# EAGLE board Crimea (EAGLE 8.2.1), part 1 of 2
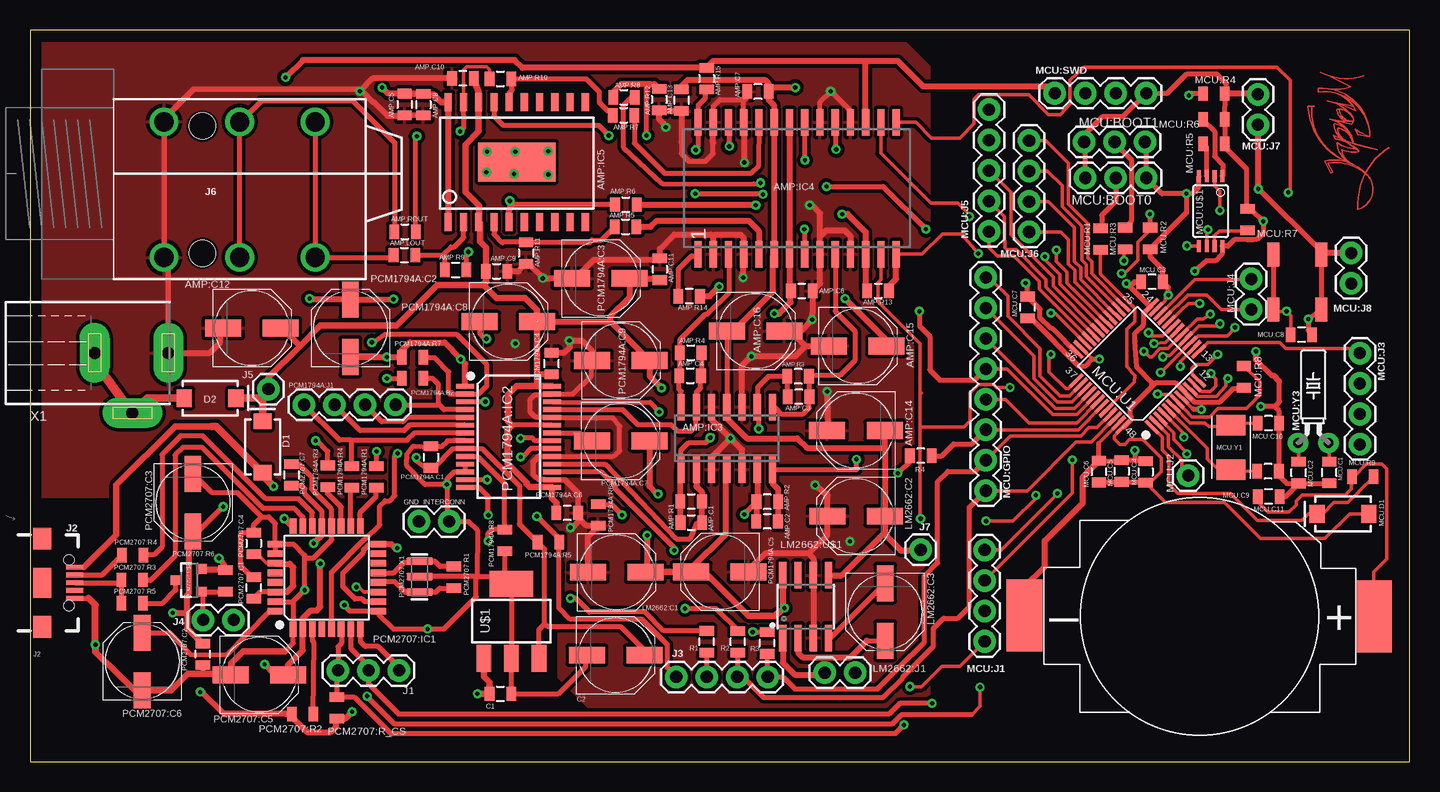
[diagram p0: board, top side]
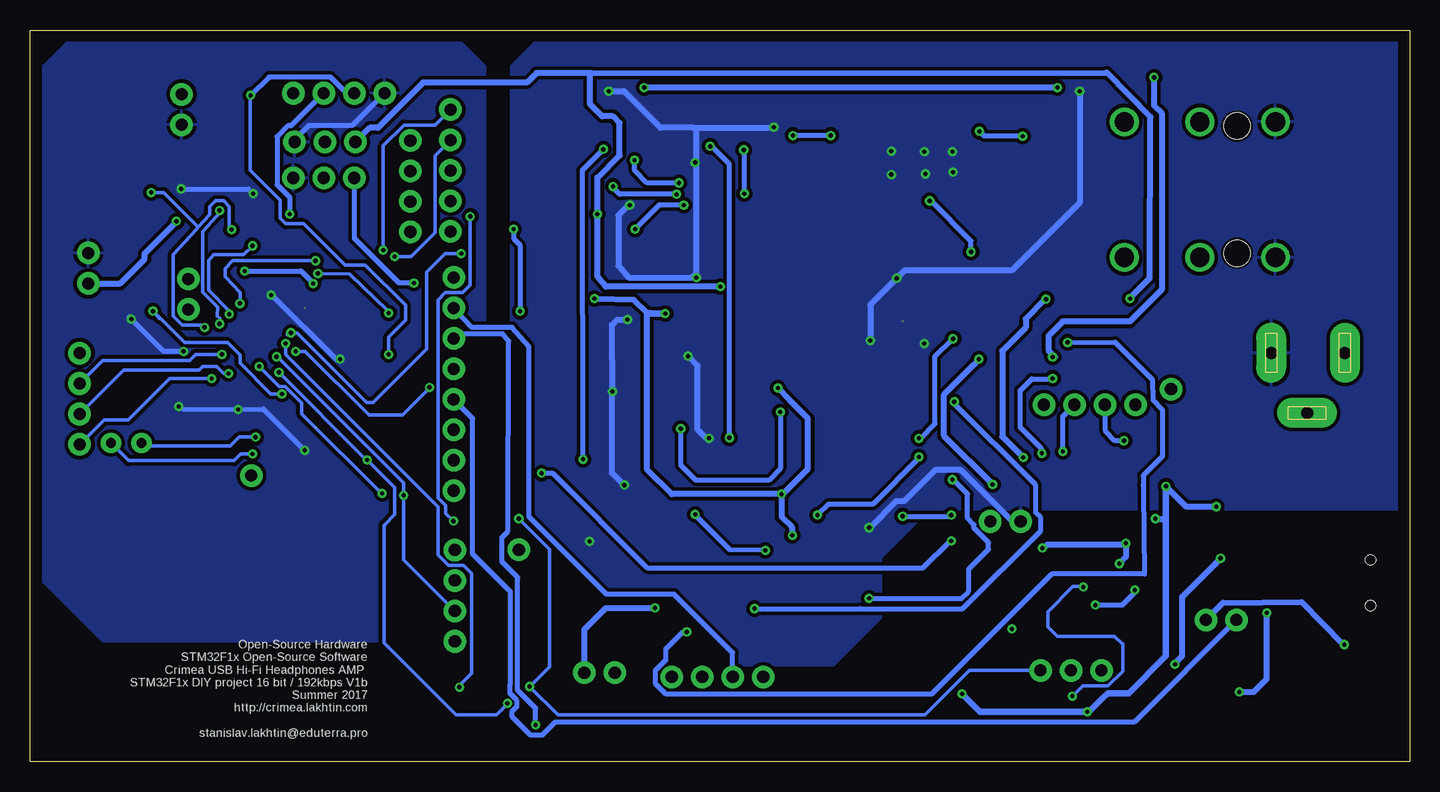
[diagram p1: board, bottom side, seen from below]

Size 115 x 61 mm. Coordinates in mm from the lower left corner, seen from the top.
Outline: 0,0 115,0 115,61 0,61 0,0
Copper layers (1*16): Top 0.035mm / dielectric 1.6mm / Bottom 0.035mm
Design rules "default *": minimum track width 0.2mm, minimum drill 0.2mm, track to track 0.3mm, track to pad 0.3mm, pad to pad 0.3mm, via to via 0.3mm, smd to smd 0.1mm, copper to edge 0.2mm, drill to drill 0.2mm, minimum pad ring 10mil, minimum via ring 8mil, stop-mask expansion 4mil, vias tented up to drill 0mil, thermal gap 12mil
Net classes: 0 default: width 0.3 mm; 1 GND: width 0.4 mm, drill 0.6 mm; 2 DGND: width 0.4 mm, drill 0.4 mm; 3 POWER: width 0.4 mm, drill 0.6 mm

## Footprints (pad centres in the part's own frame; a part is rotated, then mirrored left to right if it is on the bottom)
0805 = smd 0.8 x 1.2: 1 -0.9,0; 2 0.9,0
PANASONIC_D = smd 3 x 1.4: + 2.4,0; - -2.4,0
SO14 = smd 0.6 x 2.2: 1 -3.81,-2.6; 2 -2.54,-2.6; 3 -1.27,-2.6; 4 0,-2.6; 5 1.27,-2.6; 6 2.54,-2.6; 7 3.81,-2.6; 8 3.81,2.6; 9 2.54,2.6; 10 1.27,2.6; 11 0,2.6; 12 -1.27,2.6; 13 -2.54,2.6; 14 -3.81,2.6
SOP28 = smd 0.6 x 2.2: 1 -8.255,-5.5; 2 -6.985,-5.5; 3 -5.715,-5.5; 4 -4.445,-5.5; 5 -3.175,-5.5; 6 -1.905,-5.5; 7 -0.635,-5.5; 8 0.635,-5.5; 9 1.905,-5.5; 10 3.175,-5.5; 11 4.445,-5.5; 12 5.715,-5.5; 13 6.985,-5.5; 14 8.255,-5.5; 15 8.255,5.5; 16 6.985,5.5; 17 5.715,5.5; 18 4.445,5.5; 19 3.175,5.5; 20 1.905,5.5; 21 0.635,5.5; 22 -0.635,5.5; 23 -1.905,5.5; 24 -3.175,5.5; 25 -4.445,5.5; 26 -5.715,5.5; 27 -6.985,5.5; 28 -8.255,5.5
SOIC20S = smd 0.6 x 1.5: 1 -5.715,-5; 2 -4.445,-5; 3 -3.175,-5; 4 -1.905,-5; 5 -0.635,-5; 6 0.635,-5; 7 1.905,-5; 8 3.175,-5; 9 4.445,-5; 10 5.715,-5; 11 5.715,5; 12 4.445,5; 13 3.175,5; 14 1.905,5; 15 0.635,5; 16 -0.635,5; 17 -1.905,5; 18 -3.175,5; 19 -4.445,5; 20 -5.715,5 | smd 6.452 x 3.251: P$1 0,0
SMA-DIODE = smd 1.27 x 1.47: A -2.15,0; C 2.15,0
1X02 = drill 1.016 pad 1.88: 1 0,0; 2 2.54,0
1X03 = drill 1.016 pad 1.88: 1 0,0; 2 2.54,0; 3 5.08,0
USB-AB-MICRO-SMD = smd 1.4 x 0.4: D+1 2.7,0; D-1 2.7,0.65; GND1 2.7,-1.3; ID1 2.7,-0.65; VBUS1 2.7,1.3 | smd 1.5 x 1.8: SHLD1 0,-3.68; SHLD2 0,3.68 | smd 1.5 x 2.5: SHLD3 0,0 | hole 0.85: 2.2,1.9; 2.2,-1.9
1X04 = drill 1.016 pad 1.88: 1 0,0; 2 2.54,0; 3 5.08,0; 4 7.62,0
1X01 = drill 1.016 pad 1.88: 1 0,0
AUDIO_JACK_0.25"_TRS_PTH_RA = drill 1.6: RING 10.5,-6.95; RING-NORM 10.5,4.35; SLEEVE 4.2,-6.95; SLEEVE-NORM 4.2,4.35; TIP 16.8,-6.95; TIP-NORM 16.8,4.35 | hole 2.2: 7.4,4; 7.4,-6.6
SOIC-8 = smd 0.61 x 2.21: 1 -1.905,-2.616; 2 -0.635,-2.616; 3 0.635,-2.616; 4 1.905,-2.616; 5 1.905,2.616; 6 0.635,2.616; 7 -0.635,2.616; 8 -1.905,2.616
1X08 = drill 1.016 pad 1.88: 1 0,0; 2 2.54,0; 3 5.08,0; 4 7.62,0; 5 10.16,0; 6 12.7,0; 7 15.24,0; 8 17.78,0
1X05 = drill 1.016 pad 1.88: 1 0,0; 2 2.54,0; 3 5.08,0; 4 7.62,0; 5 10.16,0
LQFP48-0.5-7X7MM = smd 1.5 x 0.3: 1 -4.45,2.75; 2 -4.45,2.25; 3 -4.45,1.75; 4 -4.45,1.25; 5 -4.45,0.75; 6 -4.45,0.25; 7 -4.45,-0.25; 8 -4.45,-0.75; 9 -4.45,-1.25; 10 -4.45,-1.75; 11 -4.45,-2.25; 12 -4.45,-2.75; 25 4.45,-2.75; 26 4.45,-2.25; 27 4.45,-1.75; 28 4.45,-1.25; 29 4.45,-0.75; 30 4.45,-0.25; 31 4.45,0.25; 32 4.45,0.75; 33 4.45,1.25; 34 4.45,1.75; 35 4.45,2.25; 36 4.45,2.75 | smd 0.3 x 1.5: 13 -2.75,-4.45; 14 -2.25,-4.45; 15 -1.75,-4.45; 16 -1.25,-4.45; 17 -0.75,-4.45; 18 -0.25,-4.45; 19 0.25,-4.45; 20 0.75,-4.45; 21 1.25,-4.45; 22 1.75,-4.45; 23 2.25,-4.45; 24 2.75,-4.45; 37 2.75,4.45; 38 2.25,4.45; 39 1.75,4.45; 40 1.25,4.45; 41 0.75,4.45; 42 0.25,4.45; 43 -0.25,4.45; 44 -0.75,4.45; 45 -1.25,4.45; 46 -1.75,4.45; 47 -2.25,4.45; 48 -2.75,4.45
TSSOP8 = smd 0.35 x 1: 1 -0.975,-2.925; 2 -0.325,-2.925; 3 0.325,-2.925; 4 0.975,-2.925; 5 0.975,2.925; 6 0.325,2.925; 7 -0.325,2.925; 8 -0.975,2.925
PUSHBUTTON_4X4 = smd 1 x 2: P$1 2,2.3; P$2 2,-2.3; P$3 -2,-2.3; P$4 -2,2.3
20MM_BATTERY_3V = smd 3 x 6: MINUS -14.6,0.1; PLUS 14.5,0
CRYSTAL-TXC-7A = smd 1.7 x 2.4: P$1 1.85,0; P$2 -1.85,0
CRYSTAL-PTH-2X6-CYL-KIT = drill 0.813 pad 1.676: 1 -1.27,0; 2 1.27,0
SSOP28-0.65-10.2X5.2MM = smd 0.4 x 1.5: 1 -4.225,-3.625; 2 -3.575,-3.625; 3 -2.925,-3.625; 4 -2.275,-3.625; 5 -1.625,-3.625; 6 -0.975,-3.625; 7 -0.325,-3.625; 8 0.325,-3.625; 9 0.975,-3.625; 10 1.625,-3.625; 11 2.275,-3.625; 12 2.925,-3.625; 13 3.575,-3.625; 14 4.225,-3.625; 15 4.225,3.625; 16 3.575,3.625; 17 2.925,3.625; 18 2.275,3.625; 19 1.625,3.625; 20 0.975,3.625; 21 0.325,3.625; 22 -0.325,3.625; 23 -0.975,3.625; 24 -1.625,3.625; 25 -2.275,3.625; 26 -2.925,3.625; 27 -3.575,3.625; 28 -4.225,3.625
TQFP32-0.8-7X7MM = smd 1.27 x 0.559: 1 -4.293,2.8; 2 -4.293,2; 3 -4.293,1.2; 4 -4.293,0.4; 5 -4.293,-0.4; 6 -4.293,-1.2; 7 -4.293,-2; 8 -4.293,-2.8; 17 4.293,-2.8; 18 4.293,-2; 19 4.293,-1.2; 20 4.293,-0.4; 21 4.293,0.4; 22 4.293,1.2; 23 4.293,2; 24 4.293,2.8 | smd 0.559 x 1.27: 9 -2.8,-4.293; 10 -2,-4.293; 11 -1.2,-4.293; 12 -0.4,-4.293; 13 0.4,-4.293; 14 1.2,-4.293; 15 2,-4.293; 16 2.8,-4.293; 25 2.8,4.293; 26 2,4.293; 27 1.2,4.293; 28 0.4,4.293; 29 -0.4,4.293; 30 -1.2,4.293; 31 -2,4.293; 32 -2.8,4.293
SOT23-3 = smd 0.8 x 0.9: 1 -0.95,-1; 2 0.95,-1; 3 0,1.1
RESONATOR-SMD-3.2X1.3 = smd 0.61 x 2.184: 1 -1.283,-0.006; 2 0,0; 3 1.27,-0.006
SOT223 = smd 1.219 x 2.235: 1 -2.311,-3.099; 2 0,-3.099; 3 2.311,-3.099 | smd 3.6 x 2.2: 4 0,3.099
733980-62 = drill 1 pad 2.5 long: 1 0,8.57; 2 0,2.42; 3 5,5.57

## Placement (x,y rotation side)
AMP:C1  2.7nF  [0805]  55.13,19.93 0 top
AMP:C2  2.7nF  [0805]  61.45,20.02 180 top
AMP:C3  2.7nF  [0805]  64.08,30.42 180 top
AMP:C4  2.7nF  [0805]  55.04,32.18 0 top
AMP:C5  0.1uF  [0805]  31.23,54.79 270 top
AMP:C6  0.1uF  [0805]  64.34,39.24 0 top
AMP:C7  0.1uF  [0805]  60.69,55.86 180 top
AMP:C8  10uF  [0805]  32.79,54.77 270 top
AMP:C9  0.1uF  [0805]  38.9,40.89 0 top
AMP:C10  10uF  [0805]  36.09,56.97 180 top
AMP:C11  0.1uF  [0805]  52.5,41.05 270 top
AMP:C12  10uF  [PANASONIC_D]  18.5,36.15 0 top
AMP:C13  0.1uF  [0805]  54.3,55.15 270 top
AMP:C14  10uF  [PANASONIC_D]  68.85,27.6 180 top
AMP:C15  100uF  [PANASONIC_D]  69,34.65 0 top
AMP:C16  100uF  [PANASONIC_D]  60.5,35.9 0 top
AMP:IC3  OPA4134D  [SO14]  58.09,26.95 0 top
AMP:IC4  PGA4311  [SOP28]  63.95,47.8 0 top
AMP:IC5  TPA6120A2  [SOIC20S]  40.58,49.99 0 top
AMP:LOUT  37,8  [0805]  31.21,42.23 0 top
AMP:R1  1K  [0805]  55.12,21.69 0 top
AMP:R2  1K  [0805]  61.46,21.66 180 top
AMP:R3  1K  [0805]  64.04,32.11 180 top
AMP:R4  1K  [0805]  55.08,34.09 0 top
AMP:R5  1K  [0805]  49.65,44.59 0 top
AMP:R6  1K  [0805]  49.67,46.44 0 top
AMP:R7  1K  [0805]  49.49,53.89 0 top
AMP:R8  1K  [0805]  49.51,55.39 0 top
AMP:R9  1K  [0805]  35.48,40.99 0 top
AMP:R10  1K  [0805]  39.21,56.93 0 top
AMP:R11  1K  [0805]  41.35,42.4 270 top
AMP:R12  1K  [0805]  52.45,55.2 270 top
AMP:R13  100K  [0805]  70.7,39.25 0 top
AMP:R14  100K  [0805]  54.95,38.8 180 top
AMP:R15  100K  [0805]  56.4,56.95 270 top
AMP:ROUT  37,8  [0805]  31.26,44.18 0 top
C1  1.5uF  [0805]  39.21,5.65 0 top
C2  220uF  [PANASONIC_D]  48.82,8.87 0 top
D1  0.5A/5V  [SMA-DIODE]  19.4,26.23 90 top
D2  1.5A/5V  [SMA-DIODE]  15.01,30.3 0 top
GND_INTERCONN  GNDCONNECTOR  [1X02]  32.41,20.02 0 top
J1  SPI  [1X03]  30.76,7.6 180 top
J2  USB_MICRO  [USB-AB-MICRO-SMD]  1.04,14.91 0 top
J3  SWITCHERS  [1X04]  53.88,7.05 0 top
J4  PULLUP  [1X02]  14.43,11.8 0 top
J5  V+  [1X01]  19.87,31.05 0 top
J6  HEADPHONES  [AUDIO_JACK_0.25"_TRS_PTH_RA]  6.97,48.99 0 top
J7  [1X01]  74.25,17.65 0 top
LM2662:C1  150nF  [PANASONIC_D]  48.9,15.79 0 top
LM2662:C2  47uF  [PANASONIC_D]  68.86,20.46 180 top
LM2662:C3  47uF  [PANASONIC_D]  71.29,12.47 270 top
LM2662:J1  20/150Khz  [1X02]  66.25,7.4 0 top
LM2662:U$1  LM2662  [SOIC-8]  64.66,12.91 0 top
MCU:BOOT0  [1X03]  93.05,48.66 180 top
MCU:BOOT1  [1X03]  92.95,51.66 180 top
MCU:C1  22pF  [0805]  108.31,24.1 90 top
MCU:C2  22pF  [0805]  105.76,24.09 90 top
MCU:C3  1uF  [0805]  93.54,40 180 top
MCU:C4  1uF  [0805]  93,24.15 270 top
MCU:C5  1uF  [0805]  91,24.21 270 top
MCU:C6  1uF  [0805]  89.1,24.17 270 top
MCU:C7  1uF  [0805]  83.15,37.87 90 top
MCU:C8  22pF  [0805]  105.99,35.6 180 top
MCU:C9  22pF  [0805]  103.2,24.2 180 top
MCU:C10  22pF  [0805]  103.24,28.21 180 top
MCU:C11  100nF  [0805]  103.25,22.1 180 top
MCU:D1  1A/5V/500mV  [SMA-DIODE]  109.45,20.65 180 top
MCU:GPIO  GPIO  [1X08]  79.68,22.58 90 top
MCU:J1  SPI1  [1X04]  79.59,10.02 90 top
MCU:J2  [1X01]  96.55,23.85 0 top
MCU:J3  USART2  [1X04]  110.86,34.06 270 top
MCU:J4  I2C_2  [1X02]  101.81,40.24 270 top
MCU:J5  USART1  [1X05]  79.94,44.2 90 top
MCU:J6  SPI2  [1X04]  83.29,44.16 90 top
MCU:J7  POWER  [1X02]  102.36,55.64 270 top
MCU:J8  POWER  [1X02]  110.14,39.86 90 top
MCU:R1  100K  [0805]  89.24,43.56 270 top
MCU:R2  100K  [0805]  91.29,43.62 270 top
MCU:R3  10K  [0805]  93.36,43.62 90 top
MCU:R4  10K  [0805]  98.69,55.69 0 top
MCU:R5  100K  [0805]  98.69,51.49 0 top
MCU:R6  100K  [0805]  98.69,53.54 0 top
MCU:R7  100K  [0805]  101.51,45.18 90 top
MCU:R8  100K  [0805]  101.19,32.08 270 top
MCU:R9  100  [0805]  111.1,23.75 0 top
MCU:SWD  DEBUG  [1X04]  93.05,55.73 180 top
MCU:U1  STM32F103CBT6-LQFP48  [LQFP48-0.5-7X7MM]  92.32,32.98 135 top
MCU:U$1  M95320-D  [TSSOP8]  98.42,45.89 180 top
MCU:U$2  PUSHBUTTON  [PUSHBUTTON_4X4]  105.65,39.99 180 top
MCU:U$3  20MM_BATTERY_3V  [20MM_BATTERY_3V]  97.5,12.1 0 top
MCU:Y1  16 Mhz  [CRYSTAL-TXC-7A]  100.11,26.19 90 top
MCU:Y3  32.768kHz  [CRYSTAL-PTH-2X6-CYL-KIT]  106.98,26.57 0 top
PCM1794A:C1  0.1uF  [0805]  33.42,25.38 270 top
PCM1794A:C2  10uF  [PANASONIC_D]  26.71,36.14 90 top
PCM1794A:C3  10uF  [PANASONIC_D]  47.59,40.29 0 top
PCM1794A:C4  0.1uF  [0805]  43.48,33.19 90 top
PCM1794A:C5  10uF  [PANASONIC_D]  57.51,15.81 180 top
PCM1794A:C6  0.1uF  [0805]  44.79,20.73 180 top
PCM1794A:C7  47uF  [PANASONIC_D]  49.24,26.74 0 top
PCM1794A:C8  47uF  [PANASONIC_D]  39.89,36.69 0 top
PCM1794A:C9  10uF  [PANASONIC_D]  49.26,33.44 0 top
PCM1794A:IC2  PCM1794A  [SSOP28-0.65-10.2X5.2MM]  39.91,27.07 270 top
PCM1794A:J1  I2S  [1X04]  22.85,29.75 0 top
PCM1794A:R1  27  [0805]  28.88,23.74 90 top
PCM1794A:R2  10  [0805]  31.89,31.97 0 top
PCM1794A:R3  10  [0805]  24.83,23.79 90 top
PCM1794A:R4  10  [0805]  26.83,23.74 90 top
PCM1794A:R5  27  [0805]  43.21,18.28 180 top
PCM1794A:R6  10K  [0805]  47.37,20.56 270 top
PCM1794A:R7  100K  [0805]  31.89,33.72 0 top
PCM1794A:R8  100K  [0805]  39.58,18.44 90 top
PCM2707:C1  1uF  [0805]  18.65,14.49 90 top
PCM2707:C2  1uF  [0805]  14.4,8.95 90 top
PCM2707:C3  0.1uF  [PANASONIC_D]  13.59,21.6 270 top
PCM2707:C4  1uF  [0805]  18.65,18.19 270 top
PCM2707:C5  10uF  [PANASONIC_D]  19.12,7.24 0 top
PCM2707:C6  10uF  [PANASONIC_D]  9.36,8.34 90 top
PCM2707:C7  1uF  [0805]  21.8,23.9 270 top
PCM2707:IC1  PCM2707  [TQFP32-0.8-7X7MM]  24.74,15.33 90 top
PCM2707:R1  1M  [0805]  35.33,15.37 90 top
PCM2707:R2  400k  [0805]  22.72,3.97 0 top
PCM2707:R3  22  [0805]  8.51,15.15 180 top
PCM2707:R4  22  [0805]  8.56,17.2 180 top
PCM2707:R5  1.5K  [0805]  8.51,13.2 180 top
PCM2707:R6  400K  [0805]  16.3,15.06 270 top
PCM2707:R_CS  100k  [0805]  25.57,4.48 270 top
PCM2707:U$2  IRLML2246TRPBF  [SOT23-3]  13.29,15.11 90 top
PCM2707:X1  12MHz CSTCE12MOG52-R0  [RESONATOR-SMD-3.2X1.3]  32.48,15.42 90 top
R1  20  [0805]  56.4,10 90 top
R2  20  [0805]  59,9.99 90 top
R3  20  [0805]  61.45,9.88 90 top
R4  20  [0805]  74.25,25.5 180 top
U$1  LM3940IMP-3.3/NOPB  [SOT223]  40.13,11.71 0 top
U$3  [CRIMEA_TOP]  111.8,48.35 90 top
X1  EXT_+5V  [733980-62]  2.97,34.07 270 top

## Library data of the parts
AMP:C1-AMP:C11 AMP:C13 AMP:LOUT AMP:R1-AMP:R15 AMP:ROUT C1 C2 LM2662:C1-LM2662:C3 MCU:C1-MCU:C11 PCM1794A:C1-PCM1794A:C9 PCM2707:C1-PCM2707:C7 R1-R4 = SparkFun-Passives
AMP:C12 AMP:C14-AMP:C16 = SparkFun-Capacitors; PROD_ID: CAP-12547
AMP:IC3 = linear
AMP:IC4 AMP:IC5 LM2662:U$1 MCU:U$1-MCU:U$3 PCM1794A:IC2 PCM2707:IC1 PCM2707:U$2 U$1 U$3 = EduAreaLib
D1 D2 MCU:D1 = SparkFun-DiscreteSemi; PROD_ID: DIO-08053
GND_INTERCONN J1 J4 J5 J7 LM2662:J1 MCU:J2 MCU:J4 MCU:J5 MCU:J7 MCU:J8 = SparkFun-Connectors
J2 = SparkFun-Connectors; PROD_ID: CONN-11794
J3 MCU:J1 MCU:J3 MCU:J6 MCU:SWD PCM1794A:J1 = SparkFun-Connectors; PROD_ID: CONN-09696
J6 = SparkFun-Connectors; PROD_ID: CONN-12339; SF_ID: COM-11144
MCU:BOOT0 MCU:BOOT1 = SparkFun-Retired
MCU:GPIO = SparkFun-Connectors; PROD_ID: CONN-08438
MCU:R1-MCU:R9 PCM1794A:R1-PCM1794A:R8 PCM2707:R1-PCM2707:R6 PCM2707:R_CS = SparkFun-Resistors
MCU:U1 = Seeed-OPL-ic; MPN: STM32F103CBT6
MCU:Y1 = SparkFun-FreqCtrl
MCU:Y3 = SparkFun-Clocks; PROD_ID: XTAL-10112
PCM2707:X1 = SparkFun-Clocks; PROD_ID: XTAL-08895
X1 = con-conrad

## Nets
!PCM2702_CS!: J1.3 MCU:GPIO.6 MCU:U1.40 PCM2707:IC1.6 PCM2707:R_CS.1
!PGA4311_CS!: AMP:IC4.14 AMP:R13.2 MCU:U1.19
!RST!: J3.1 PCM1794A:IC2.14 PCM1794A:R5.1
!SSPND!: MCU:U1.18 PCM2707:IC1.11
+3.3V: AMP:IC4.12 AMP:R13.1 AMP:R14.1 C2.+ MCU:BOOT0.3 MCU:BOOT1.3 MCU:C3.2 MCU:C4.2 MCU:C5.2 MCU:C6.2 MCU:C7.2 MCU:D1.A MCU:J7.1 MCU:J8.1 MCU:R4.2 MCU:R5.2 MCU:R6.2 MCU:R7.2 MCU:R8.2 MCU:SWD.1 MCU:U1.9 MCU:U1.24 MCU:U1.36 MCU:U1.48 MCU:U$1.8 PCM1794A:C1.2 PCM1794A:C2.+ PCM1794A:IC2.9 PCM1794A:R5.2 U$1.3
AMP:!MUTE!: AMP:IC4.1 AMP:R14.2
AMP:AMP_A: AMP:C1.1 AMP:IC3.1 AMP:IC4.26 AMP:R1.1
AMP:AMP_B: AMP:C2.1 AMP:IC3.7 AMP:IC4.19 AMP:R2.1
AMP:AMP_C: AMP:C3.1 AMP:IC3.8 AMP:IC4.10 AMP:R3.1
AMP:AMP_D: AMP:C4.1 AMP:IC3.14 AMP:IC4.3 AMP:R4.1
AMP:N$2: AMP:IC5.5 AMP:R6.1 AMP:R9.2
AMP:N$3: AMP:IC5.4 AMP:R5.1 AMP:R11.1
AMP:N$5: AMP:IC5.16 AMP:R7.1 AMP:R10.2
AMP:N$6: AMP:IC5.17 AMP:R8.1 AMP:R12.1
AMP:N$8: AMP:IC5.2 AMP:LOUT.2 AMP:R9.1
AMP:N$9: AMP:IC5.19 AMP:R10.1 AMP:ROUT.2
AMP:VOL_A: AMP:IC4.24 AMP:R7.2
AMP:VOL_B: AMP:IC4.21 AMP:R8.2
AMP:VOL_C: AMP:IC4.8 AMP:R6.2
AMP:VOL_D: AMP:IC4.5 AMP:R5.2
CHSL: PCM1794A:IC2.2 PCM1794A:R7.2 R3.2
DEM: PCM1794A:IC2.3 R2.2
DGND [GND]: AMP:IC4.17 AMP:R15.1 C1.2 C2.- GND_INTERCONN.2 J2.GND1 J4.2 MCU:BOOT0.1 MCU:BOOT1.1 MCU:C1.1 MCU:C2.1 MCU:C3.1 MCU:C4.1 MCU:C5.1 MCU:C6.1 MCU:C7.1 MCU:C8.1 MCU:C9.1 MCU:C10.1 MCU:C11.1 MCU:J7.2 MCU:J8.2 MCU:R3.1 MCU:SWD.4 MCU:U1.8 MCU:U1.23 MCU:U1.35 MCU:U1.47 MCU:U$1.4 MCU:U$2.P$3 MCU:U$2.P$4 MCU:U$3.MINUS PCM1794A:C1.1 PCM1794A:C2.- PCM1794A:IC2.1 PCM1794A:IC2.8 PCM1794A:IC2.11 PCM1794A:IC2.12 PCM1794A:R7.1 PCM1794A:R8.1 PCM2707:C1.2 PCM2707:C2.1 PCM2707:C3.- PCM2707:C4.1 PCM2707:C5.- PCM2707:C6.- PCM2707:C7.1 PCM2707:IC1.1 PCM2707:IC1.9 PCM2707:IC1.20 PCM2707:IC1.25 PCM2707:IC1.26 PCM2707:IC1.31 PCM2707:X1.2 U$1.2 U$1.4
EXT+5V: D2.A X1.2 X1.3
GND [GND]: AMP:C5.2 AMP:C6.2 AMP:C7.2 AMP:C8.2 AMP:C9.2 AMP:C10.2 AMP:C11.1 AMP:C12.- AMP:C13.2 AMP:C14.+ AMP:C15.- AMP:C16.+ AMP:IC3.3 AMP:IC3.5 AMP:IC3.10 AMP:IC3.12 AMP:IC4.2 AMP:IC4.4 AMP:IC4.9 AMP:IC4.11 AMP:IC4.18 AMP:IC4.20 AMP:IC4.25 AMP:IC4.27 AMP:R11.2 AMP:R12.2 GND_INTERCONN.1 J6.SLEEVE J6.SLEEVE-NORM LM2662:C1.- LM2662:C2.+ LM2662:U$1.3 LM2662:U$1.6 PCM1794A:C3.- PCM1794A:C4.2 PCM1794A:C5.- PCM1794A:C6.1 PCM1794A:C9.- PCM1794A:IC2.16 PCM1794A:IC2.19 PCM1794A:IC2.24 PCM1794A:IC2.27 PCM1794A:R6.2 X1.1
LM2662:FC: LM2662:J1.1 LM2662:U$1.1
LM2662:N$1: LM2662:C3.+ LM2662:U$1.2
LM2662:N$2: LM2662:C3.- LM2662:U$1.4
MCU:!EEPROM_CS!: MCU:R6.1 MCU:U$1.1
MCU:!EEPROM_HOLD!: MCU:R7.1 MCU:U$1.7
MCU:!RST!: MCU:C8.2 MCU:R8.1 MCU:U1.7 MCU:U$2.P$1 MCU:U$2.P$2
MCU:!W!: MCU:R5.1 MCU:U$1.3
MCU:BOOT0: MCU:R1.2 MCU:U1.44
MCU:I2C2_SCL: MCU:J4.2 MCU:U1.21
MCU:I2C2_SDA: MCU:J4.1 MCU:U1.22
MCU:N$1: MCU:D1.C MCU:R9.2 MCU:U1.1
MCU:N$3: MCU:C11.2 MCU:R9.1 MCU:U$3.PLUS
MCU:N$7: MCU:BOOT0.2 MCU:R1.1
MCU:N$10: MCU:BOOT1.2 MCU:R2.1
MCU:OSC32_IN: MCU:C1.2 MCU:U1.3 MCU:Y3.2
MCU:OSC32_OUT: MCU:C2.2 MCU:U1.4 MCU:Y3.1
MCU:OSC_IN: MCU:C9.2 MCU:U1.5 MCU:Y1.P$2
MCU:OSC_OUT: MCU:C10.2 MCU:U1.6 MCU:Y1.P$1
MCU:PA8: MCU:J5.5 MCU:U1.29
MCU:PA9: MCU:J5.4 MCU:U1.30
MCU:PA10: MCU:J5.3 MCU:U1.31
MCU:PA11: MCU:J5.2 MCU:U1.32
MCU:PA12: MCU:J5.1 MCU:U1.33
MCU:PA15: MCU:GPIO.8 MCU:U1.38
MCU:PB2: MCU:R2.2 MCU:U1.20
MCU:PB15: MCU:J6.1 MCU:U1.28
MCU:PC13: MCU:J2.1 MCU:U1.2
MCU:SPI1_NSS: MCU:J1.4 MCU:U1.14
MCU:SPI2_MISO: MCU:J6.2 MCU:U1.27
MCU:SPI2_NSS: MCU:J6.4 MCU:U1.25
MCU:SPI2_SCK: MCU:J6.3 MCU:U1.26
MCU:SWDCLK: MCU:R4.1 MCU:SWD.3 MCU:U1.37
MCU:SWDIO: MCU:R3.2 MCU:SWD.2 MCU:U1.34
MCU:USART2_CTS: MCU:J3.4 MCU:U1.10
MCU:USART2_RTS: MCU:J3.3 MCU:U1.11
MCU:USART2_RX: MCU:J3.1 MCU:U1.13
MCU:USART2_TX: MCU:J3.2 MCU:U1.12
MUTE: MCU:GPIO.3 MCU:U1.43 R4.1
N$1: J2.D-1 PCM2707:R4.2
N$2: J2.D+1 PCM2707:R3.2 PCM2707:R5.2
N$3: AMP:C3.2 AMP:IC3.9 AMP:R3.2 PCM1794A:IC2.26
N$4: AMP:LOUT.1 J6.TIP J6.TIP-NORM
N$5: PCM1794A:R4.1 PCM2707:IC1.18
N$6: PCM1794A:R2.1 PCM2707:IC1.5
N$7: PCM1794A:R3.1 PCM2707:IC1.19
N$8: PCM1794A:R1.1 PCM2707:IC1.17
N$9: AMP:ROUT.1 J6.RING J6.RING-NORM
N$10: AMP:C4.2 AMP:IC3.13 AMP:R4.2 PCM1794A:IC2.25
N$11: PCM1794A:IC2.10 PCM1794A:R8.2 R4.2
N$14: AMP:C1.2 AMP:IC3.2 AMP:R1.2 PCM1794A:IC2.18
N$15: AMP:C2.2 AMP:IC3.6 AMP:R2.2 PCM1794A:IC2.17
PB3: J3.2 MCU:GPIO.7 MCU:U1.39 R1.1
PB8: J3.4 MCU:GPIO.2 MCU:U1.45 R3.1
PB9: J3.3 MCU:GPIO.1 MCU:U1.46 R2.1
PCM1794A:BCK_INT: PCM1794A:IC2.6 PCM1794A:J1.2 PCM1794A:R3.2
PCM1794A:DATA_INT: PCM1794A:IC2.5 PCM1794A:J1.3 PCM1794A:R1.2
PCM1794A:LRCK_INT: PCM1794A:IC2.4 PCM1794A:J1.4 PCM1794A:R2.2
PCM1794A:N$4: PCM1794A:IC2.20 PCM1794A:R6.1
PCM1794A:N$9: PCM1794A:C7.- PCM1794A:IC2.22
PCM1794A:N$10: PCM1794A:C8.- PCM1794A:IC2.21
PCM1794A:SCK_INT: PCM1794A:IC2.7 PCM1794A:J1.1 PCM1794A:R4.2
PCM2707:DIN: PCM2707:IC1.4
PCM2707:INT_3.3V: PCM2707:C5.+ PCM2707:C7.2 PCM2707:IC1.2 PCM2707:IC1.10 PCM2707:IC1.16 PCM2707:IC1.21 PCM2707:R6.1 PCM2707:U$2.2
PCM2707:INTRNL_D+: PCM2707:IC1.23 PCM2707:R3.1
PCM2707:INTRNL_D-: PCM2707:IC1.22 PCM2707:R4.1
PCM2707:INTRNL_HOST: PCM2707:IC1.3 PCM2707:R2.2
PCM2707:N$2: PCM2707:C1.1 PCM2707:C4.2 PCM2707:IC1.27 PCM2707:IC1.30
PCM2707:N$9: PCM2707:R5.1 PCM2707:U$2.3
PCM2707:RESONATOR_XTI: PCM2707:IC1.12 PCM2707:R1.1 PCM2707:X1.1
PCM2707:RESONATOR_XTO: PCM2707:IC1.13 PCM2707:R1.2 PCM2707:X1.3
PCM2707:VCOM: PCM2707:C6.+ PCM2707:IC1.32
PULLUP_D+: J4.1 MCU:GPIO.4 MCU:U1.42 PCM2707:R6.2 PCM2707:U$2.1
SPI_MISO: AMP:IC4.16 MCU:J1.2 MCU:U1.16 MCU:U$1.2
SPI_MOSI: AMP:IC4.13 J1.1 MCU:J1.1 MCU:U1.17 MCU:U$1.5 PCM2707:IC1.8
SPI_SCK: AMP:IC4.15 J1.2 MCU:J1.3 MCU:U1.15 MCU:U$1.6 PCM2707:IC1.7
USB+5V [POWER]: C1.1 D1.A J2.VBUS1 PCM2707:C2.2 PCM2707:C3.+ PCM2707:IC1.24 PCM2707:R2.1 PCM2707:R_CS.2 U$1.1
V+ [POWER]: AMP:C6.1 AMP:C9.1 AMP:C10.1 AMP:C11.2 AMP:C12.+ AMP:C15.+ AMP:IC3.4 AMP:IC4.7 AMP:IC4.22 AMP:IC5.3 AMP:IC5.18 D1.C D2.C J5.1 LM2662:C1.+ LM2662:J1.2 LM2662:U$1.8 PCM1794A:C3.+ PCM1794A:C4.1 PCM1794A:C5.+ PCM1794A:C6.2 PCM1794A:C7.+ PCM1794A:C8.+ PCM1794A:C9.+ PCM1794A:IC2.15 PCM1794A:IC2.23 PCM1794A:IC2.28
V- [POWER]: AMP:C5.1 AMP:C7.1 AMP:C8.1 AMP:C13.1 AMP:C14.- AMP:C16.- AMP:IC3.11 AMP:IC4.6 AMP:IC4.23 AMP:IC5.1 AMP:IC5.20 J7.1 LM2662:C2.- LM2662:U$1.5
ZCEN: AMP:IC4.28 AMP:R15.2 MCU:GPIO.5 MCU:U1.41
ZERO: PCM1794A:IC2.13 R1.2